# EAGLE board Street Light (EAGLE 9.7.0)

Size 260.88 x 112.06 mm. Coordinates in mm from the lower left corner, seen from the top.
Outline: 0,0 260.88,0 260.88,112.06 0,112.06 0,0
Copper layers (1*16): Top 0.035mm / dielectric 1.5mm / Bottom 0.035mm
Design rules "default": minimum track width 6mil, minimum drill 0.35mm, track to track 6mil, track to pad 6mil, pad to pad 6mil, via to via 6mil, smd to smd 6mil, copper to edge 40mil, drill to drill 6mil, minimum pad ring 10mil, minimum via ring 8mil, stop-mask expansion 4mil, vias tented up to drill 0mil, thermal gap 10mil

## Footprints (pad centres in the part's own frame; a part is rotated, then mirrored left to right if it is on the bottom)
LEDRD254W60D565H860B = drill 0.981 pad 1.581: 1 -1.27,0; 2 1.27,0
1X02 = drill 1.016 long: 1 -1.27,0; 2 1.27,0
BATTERY-GENERIC = drill 1.118 pad 3.15 octagon: + 2.54,0; - -2.54,0
28027 = drill 1.016 long: 1 -2.54,0; 2 0,0; 3 2.54,0
RESAD1016W63L850D250B = drill 0.83 pad 1.43: 1 -5.08,0; 2 5.08,0
GL5528 = drill 0.8 pad 1.4: 1 -1.702,0; 2 1.702,0
TO92 = drill 0.813 octagon: 1 -1.27,0; 2 0,1.905; 3 1.27,0
ARDUINO-UNO-R3-SHIELD = drill 1.016 pad 1.88: 3.3V 24.13,-2.54; 5V 24.13,0; A0 24.13,12.7; A1 24.13,15.24; A2 24.13,17.78; A3 24.13,20.32; A4 24.13,22.86; A5 24.13,25.4; AREF -24.13,-13.97; D2 -24.13,20.32; D3 -24.13,17.78; D4 -24.13,15.24; D5 -24.13,12.7; D6 -24.13,10.16; D7 -24.13,7.62; D8 -24.13,3.81; D9 -24.13,1.27; D10 -24.13,-1.27; D11 -24.13,-3.81; D12 -24.13,-6.35; D13 -24.13,-8.89; GND@0 24.13,2.54; GND@1 24.13,5.08; GND@2 -24.13,-11.43; IOREF 24.13,-7.62; NC 24.13,-10.16; RES 24.13,-5.08; RX -24.13,25.4; SCL -24.13,-19.05; SDA -24.13,-16.51; TX -24.13,22.86; VIN 24.13,7.62
DIP762W53P254L1969H508Q14B = drill 0.743 pad 1.343: 1 -3.81,7.62; 2 -3.81,5.08; 3 -3.81,2.54; 4 -3.81,0; 5 -3.81,-2.54; 6 -3.81,-5.08; 7 -3.81,-7.62; 8 3.81,-7.62; 9 3.81,-5.08; 10 3.81,-2.54; 11 3.81,0; 12 3.81,2.54; 13 3.81,5.08; 14 3.81,7.62

## Placement (x,y rotation side)
D1  RED  [LEDRD254W60D565H860B]  254.82,36.98 180 top
L1  LIGHTBULB  [1X02]  124.59,59.65 0 top
P1  BATTERYGENERIC  [BATTERY-GENERIC]  161.19,60.45 180 top
PIR1  PIR-SENSOR_28027  [28027]  205.3,105.71 0 top
R1  1k  [RESAD1016W63L850D250B]  89.81,69.39 90 top
R2  10k  [RESAD1016W63L850D250B]  116.4,21.01 90 top
R3  PHOTOCELL_GL5528  [GL5528]  105.77,74.18 0 top
R5  220  [RESAD1016W63L850D250B]  253.55,21.74 90 top
T1  NPN  [TO92]  116.31,29.54 0 top
U1  ARDUINO-UNO-R3-SHIELD  [ARDUINO-UNO-R3-SHIELD]  47.88,29.84 270 top
U2  74HC08_PDIP  [DIP762W53P254L1969H508Q14B]  235.77,23.01 90 top

## Library data of the parts
D1 = Tinkercad; CATEGORY: Opto-Electronic; SUB-CATEGORY: LED; VALUE: LED_RED
L1 P1 PIR1 R1-R3 R5 U1 U2 = Tinkercad
T1 = Tinkercad; CATEGORY: Transistor; SUB-CATEGORY: BJT; TYPE: NPN

## Nets
D1_C: D1.2 R5.2
L1_2: L1.2 T1.3
P1+: L1.1 P1.+
P1-: P1.- PIR1.3 R1.1 R5.1 T1.1 U1.GND@0 U1.GND@1 U1.GND@2 U2.7
T1_B: R2.2 T1.2
U1_5V: PIR1.2 R3.2 U1.5V U2.14
U1_A5: R1.2 R3.1 U1.A5
U1_D2: PIR1.1 U1.D2
U1_D3: U1.D3 U2.2
U1_D13: D1.1 U1.D13 U2.1
U2_1Y: R2.1 U2.3

## Tracks (layer width: path | path; a pad name or v marks a point on that pad's centre or on a via)
D1_C  (1 unrouted)
L1_2  (1 unrouted)
P1+  (1 unrouted)
P1-  (8 unrouted)
T1_B  (1 unrouted)
U1_5V  (3 unrouted)
U1_A5  (2 unrouted)
U1_D2  (1 unrouted)
U1_D3  (1 unrouted)
U1_D13  (2 unrouted)
U2_1Y  (1 unrouted)